# Altium PCB Main_Board.PcbDoc (part 13 of 14)
Units mm, origin at the board's own origin, x right, y up, seen from the top; angles counter-clockwise.
Board outline 142 x 82 mm, 10 copper layers (L1_Top, L2_PWR1, L3_Sig1, L4_GND1, L5_Sig2, L6_Sig3, L7_GND2, L8_Sig4, L9_GND3, L8_Bottom), stack 1.71 mm thick; 299 components, 328 nets, 2329 pads, 2908 vias.
Unrouted connection lines stored in the file: 2.
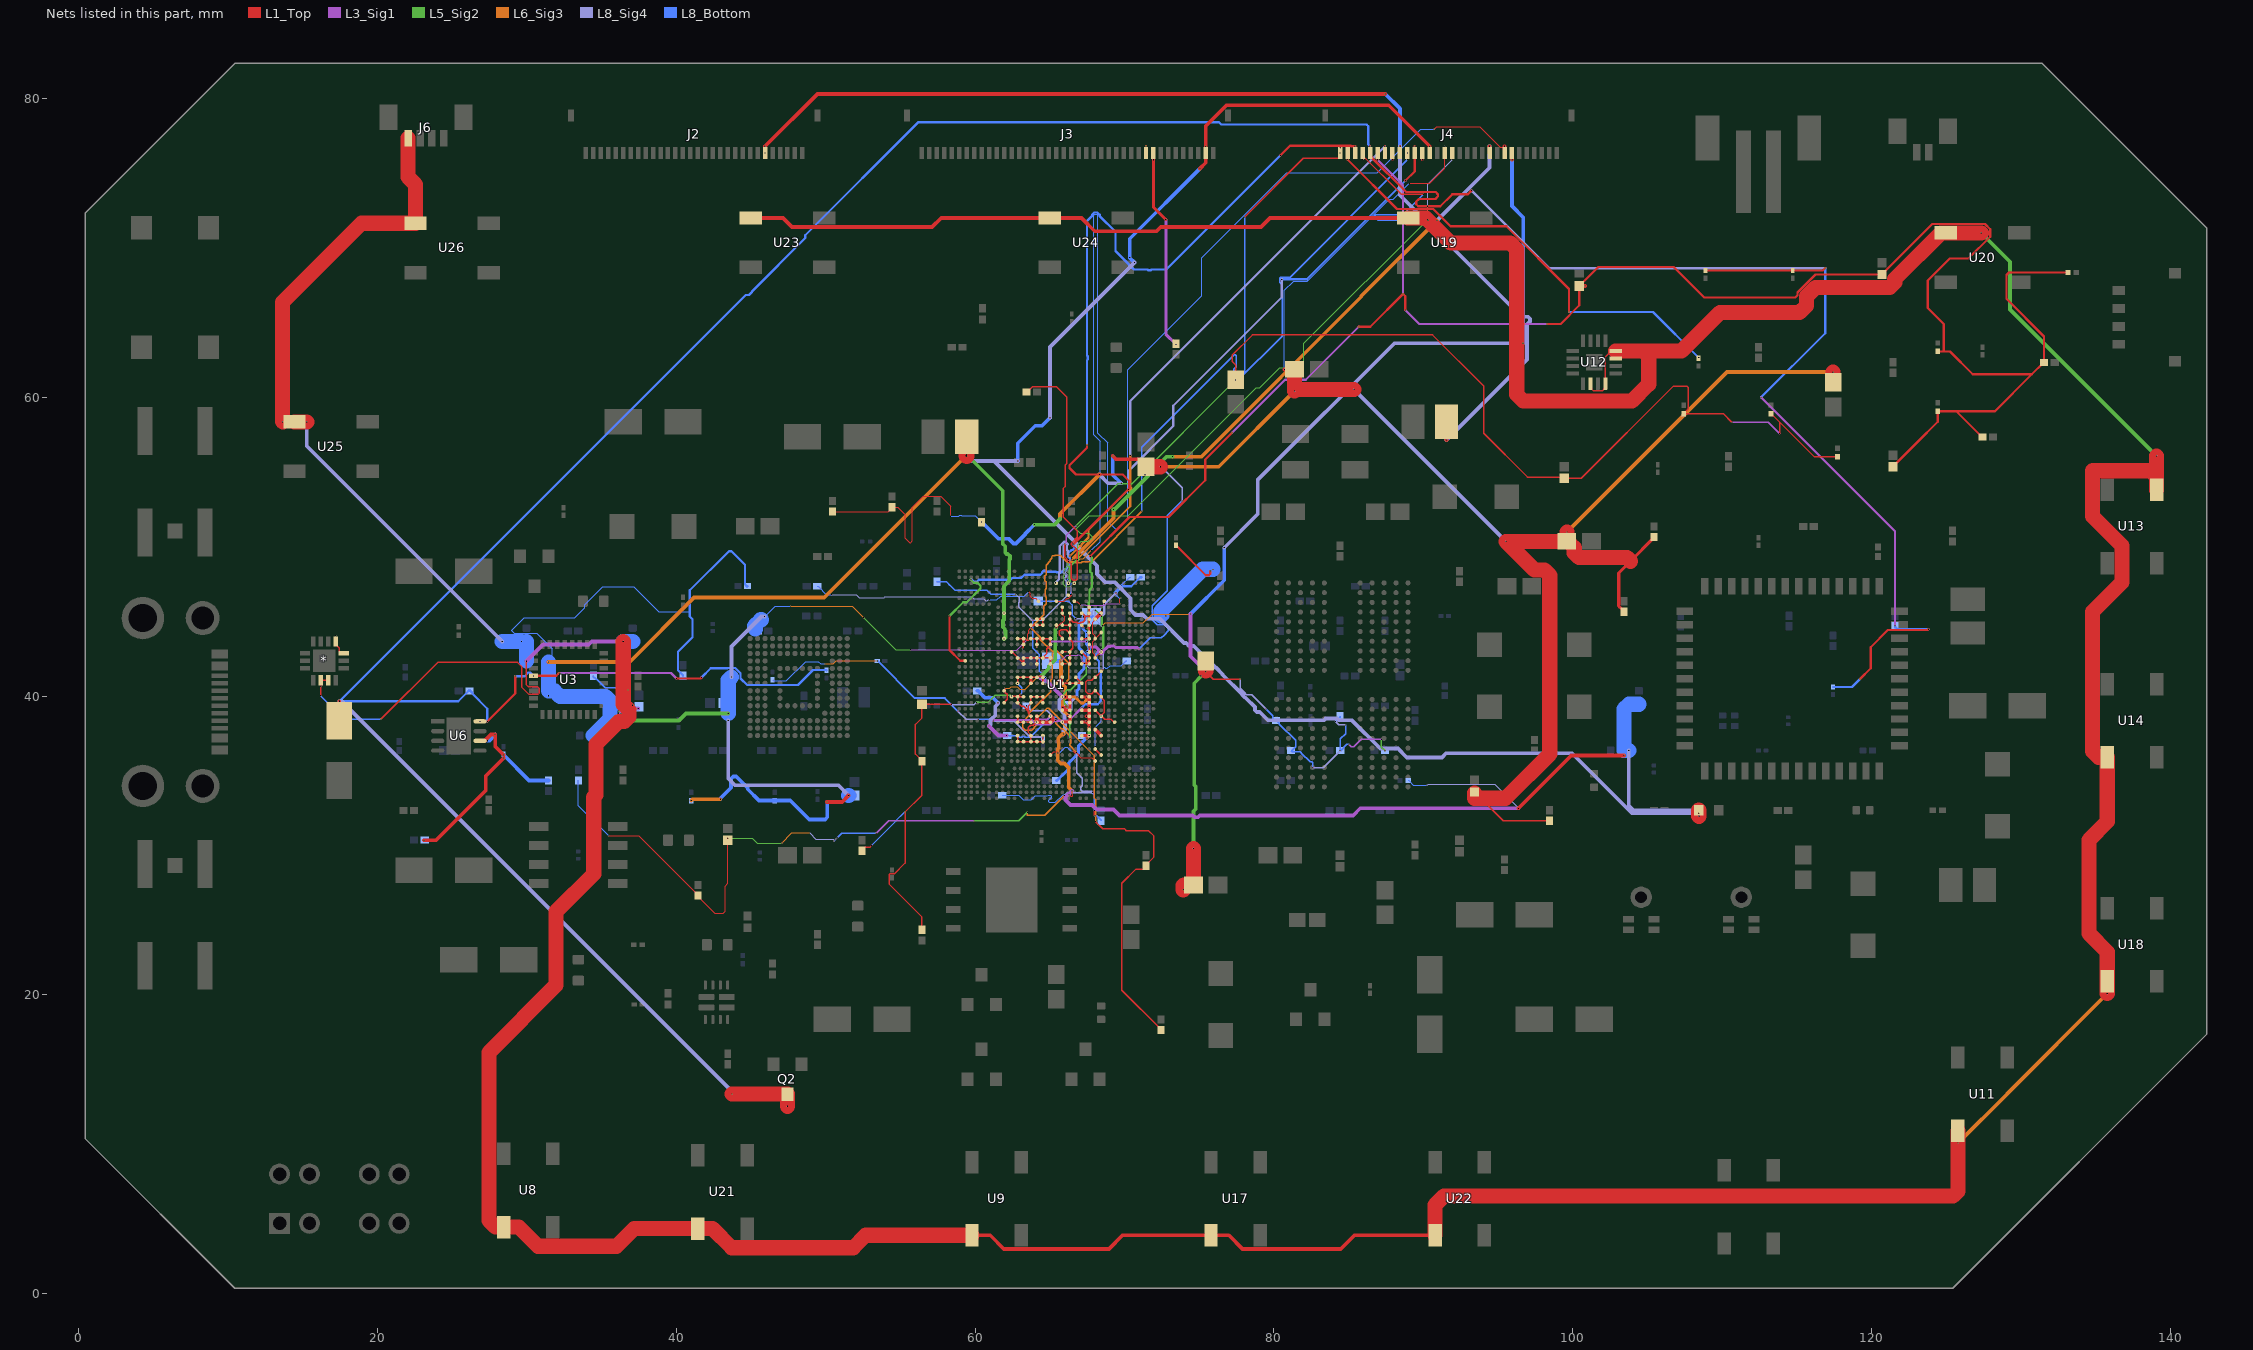
[diagram p20: the nets of this part, all layers, seen from the top]

## Via types
v1: diameter 0.1, hole 0.08, L1_Top to L8_Bottom, 1169 vias
v2: diameter 0.01, hole 0.01, L3_Sig1 to L8_Sig4, 433 vias
v3: diameter 0.01, hole 0.01, L8_Sig4 to L8_Bottom, 375 vias
v4: diameter 0.01, hole 0.01, L1_Top to L3_Sig1, 355 vias
v5: diameter 0.254, hole 0.01, L1_Top to L8_Bottom, 150 vias
v6: diameter 0.01, hole 0.01, L6_Sig3 to L8_Bottom, 129 vias
v7: diameter 0.05, hole 0.04, L1_Top to L8_Bottom, 104 vias
v8: diameter 0.01, hole 0.01, L1_Top to L5_Sig2, 89 vias
v9: diameter 0.01, hole 0.01, L1_Top to L8_Bottom, 41 vias
v10: diameter 0.1, hole 0.08, L1_Top to L3_Sig1, 17 vias
v11: diameter 0.1, hole 0.08, L1_Top to L5_Sig2, 11 vias
v12: diameter 0.1, hole 0.08, L8_Sig4 to L8_Bottom, 10 vias
v13: diameter 0.1, hole 0.08, L6_Sig3 to L8_Bottom, 9 vias
v14: diameter 1.27, hole 0.711, L1_Top to L8_Bottom, 8 vias
v15: diameter 0.4, hole 0.2, L1_Top to L8_Bottom, 4 vias
v16: diameter 0.05, hole 0.08, L1_Top to L8_Bottom, 3 vias
v17: diameter 0.05, hole 0.08, L6_Sig3 to L8_Bottom, 1 vias

## Nets (pads, with @x,y where several pads share a name; then routed paths per layer and width w, separated by ;. In a path a pad name is that pad's centre, name@x,y a point inside that pad or via, vN(x,y) a via of type N, cw(c..) or ccw(c..) an arc to the next point about the centre after c; other vN are vias at no path point) (continued)
VCC5V: *.12 *.13 C128.1 C129.1 J4.4 J6.1 U8.1 U9.1 U11.1 U12.2 U12.4 U12.7 U12.8 U13.1 U14.1 U17.1 U18.1 U19.1 U20.1 U21.1 U22.1 U23.1 U24.1 U25.1 U26.1 | length 431.8
  L1_Top w0.102: v4(16.181,40.018) 16.181,40.639 v1(16.191,40.649) *.12@16.191,41.049 *.13@16.691,41.049 ; v3(20.218,38.445) 24.024,42.251 29.37,42.251 29.643,41.978 29.643,40.597 30.112,40.128 30.771,40.128 30.812,40.17 30.812,40.529 30.712,40.628 30.086,40.628 29.937,40.778 29.937,42.304 v1(29.967,42.334) ; v1(85.941,75.899) J4.4@85.941,76.349 85.941,76.185 88.537,73.59 v4(90.013,73.59) ; U12.2@101.191,60.914 101.191,60.629 101.397,60.423 101.986,60.423 102.191,60.629 U12.4@102.191,60.914 102.191,62.699 102.591,63.099 U12.8@102.876,63.099
  L1_Top w0.254: v1(13.641,58.349) 13.661,58.349 U25.1@14.441,58.349 ; U23.1@44.991,71.999 47.14,71.999 47.748,71.391 57.122,71.391 57.73,71.999 U24.1@64.991,71.999 67.128,71.999 68.016,71.111 72.144,71.111 72.425,71.391 79.142,71.391 79.75,71.999 U19.1@88.991,71.999 ; U9.1@59.791,3.899 61.011,3.899 61.921,2.989 68.961,2.989 69.871,3.899 U17.1@75.791,3.899 76.988,3.899 77.898,2.989 84.481,2.989 85.391,3.899 U22.1@90.791,3.899
  L1_Top w1.016: v1@13.661,58.349 13.636,58.375 13.636,66.362 18.923,71.649 U26.1@22.541,71.649 22.541,74.236 22.041,74.736 J6.1@22.041,77.349 ; U25.1@14.441,58.349 v1(15.261,58.349) ; v1(36.445,43.655) 36.445,39.446 36.822,39.069 36.822,38.609 36.51,38.297 36.142,38.297 34.616,36.771 34.616,33.369 34.474,33.227 34.474,28.095 31.949,25.57 31.949,20.642 27.453,16.146 27.453,4.881 27.885,4.449 U8.1@28.441,4.449 29.448,4.449 30.73,3.167 35.999,3.167 37.181,4.349 U21.1@41.441,4.349 42.425,4.349 43.709,3.065 51.842,3.065 52.675,3.899 U9.1@59.791,3.899 ; U19.1@88.991,71.999 90.166,71.999 91.84,70.325 95.83,70.325 96.262,69.893 96.262,60.19 96.694,59.758 103.983,59.758 105.101,60.876 105.101,62.73 104.732,63.099 ; U22.1@90.791,3.899 90.791,5.926 91.385,6.52 125.461,6.52 125.791,6.85 v1@125.791,10.086 ; U12.8@102.876,63.099 104.732,63.099 ; U11.1@125.791,10.899 v1@125.791,10.086 ; v1(125.802,10.076) v1@125.791,10.086 ; v1(127.351,70.999) U20.1@124.991,70.999 124.659,70.999 121.56,67.9 121.56,67.683 121.23,67.353 116.252,67.353 115.657,66.758 115.657,66.123 115.197,65.664 109.863,65.664 107.299,63.099 105.101,63.099 104.732,63.099 ; v1(135.791,20.083) U18.1@135.791,20.899 135.791,22.87 134.565,24.097 134.565,30.37 135.791,31.597 U14.1@135.791,35.899 135.2,35.899 134.794,36.306 134.794,45.641 136.769,47.617 136.769,50.061 134.794,52.037 134.794,55.059 134.819,55.085 138.692,55.085 139.091,54.686 ; U13.1@139.091,53.799 139.091,54.686 ; v1(139.091,56.07) 139.091,54.686
  L3_Sig1 w0.254: v1(29.967,42.334) 31.084,43.451 34.133,43.451 34.337,43.655 v1(36.445,43.655)
  L5_Sig2 w0.254: v1(127.351,70.999) 129.282,69.069 129.282,65.88 v1(139.091,56.07)
  L6_Sig3 w0.254: v1(125.802,10.076) 129.104,13.378 129.104,13.396 v1(135.791,20.083)
  L8_Sig4 w0.254: v1(15.261,58.349) 15.261,56.732 v12(28.342,43.651)
  L8_Bottom w0.102: v4(16.181,40.018) 17.754,38.445 v3(20.218,38.445) ; v4(90.013,73.59) 88.638,72.215 86.819,72.215 86.759,72.155 86.759,72.071 86.979,71.852 v3(90.332,71.852)
  L8_Bottom w0.254: v1(29.642,43.651) C129.1@29.967,43.651
  L8_Bottom w1.016: v12(28.342,43.651) v1(29.642,43.651) ; v1(29.967,42.334) C129.1@29.967,43.651 ; C128.1@37.079,43.651 v1@36.448,43.651 ; v1@36.448,43.651 36.445,43.651 v1(36.445,43.655) v1@36.448,43.651
  other v2: 20.218,38.445 16.181,40.018 90.332,71.852 90.013,73.59
  other v3: 16.181,40.018 90.013,73.59
  other v4: 20.218,38.445 90.332,71.852
VCC5V_EN: J4.3 U1.R32 | length 68.2
  L1_Top w0.152: v8(58.291,45.36) 58.291,43.08 59.004,42.368 59.323,42.368 U1.R32@59.341,42.349 ; v2(66.594,50.178) 70.323,53.907 70.323,54.379 69.877,54.825 66.762,54.825 66.316,55.271 66.316,55.455 67.485,56.625 v4(67.485,56.786) ; v4(80.443,76.197) 81.091,76.845 85.131,76.845 85.177,76.799 v1(85.441,76.799) J4.3@85.441,76.349
  L5_Sig2 w0.152: v8(58.291,45.36) 59.214,46.283 59.442,46.283 60.365,47.205 60.365,47.39 60.167,47.587 59.911,47.587 v9(59.714,47.784)
  L8_Bottom w0.152: v9(59.714,47.784) 59.797,47.784 59.94,47.64 60.095,47.64 60.238,47.784 62.363,47.784 62.482,47.903 63.078,47.903 63.302,48.126 64.382,48.126 64.493,48.236 64.493,48.296 64.578,48.382 64.699,48.382 64.759,48.322 65.095,48.322 65.096,48.323 65.217,48.323 65.218,48.322 65.423,48.322 65.457,48.288 65.806,48.288 65.84,48.322 65.871,48.322 66.052,48.503 66.087,48.503 66.173,48.589 66.173,48.624 66.343,48.794 66.343,49.217 66.241,49.318 66.241,49.566 66.447,49.773 66.52,49.773 66.641,49.894 66.641,50.131 v2(66.594,50.178) ; v4(67.485,56.786) 67.485,62.467 67.539,62.521 67.539,62.747 67.485,62.801 67.485,71.802 67.821,72.138 67.821,72.223 67.972,72.374 68.186,72.374 68.337,72.223 68.337,72.138 69.396,71.079 69.396,69.788 70.631,68.553 71.545,68.553 71.596,68.501 71.76,68.501 71.812,68.553 72.799,68.553 v4(80.443,76.197)
  other v2: 67.485,56.786 80.443,76.197
  other v3: 59.714,47.784 66.594,50.178 67.485,56.786 80.443,76.197
  other v4: 66.594,50.178
VCC_MCU: C122.1 D1.2 J4.5 Q2.3 R14.2 R27.2 R28.2 R59.1 R68.2 U3.4 U6.8 | length 255
  L1_Top w0.152: v1(27.349,38.299) 29.216,40.166 v4(29.216,41.327) ; v3(30.441,41.349) 31.955,41.349 v4(32.153,41.547) ; v4(40.01,41.178) 41.618,41.178 v4(41.679,41.239) ; v1(86.441,76.799) 86.441,76.155 88.86,73.737 90.839,73.737 90.995,73.581 90.995,73.455 90.817,73.277 89.715,73.277 89.537,73.099 89.537,72.915 89.668,72.784 91.142,72.784 91.939,73.581 92.974,73.581 v4(93.236,73.843) ; R28.2@108.897,68.481 R27.2@114.739,68.481 116.738,68.481 v4(116.908,68.651) ; v3(119.24,41.14) 119.951,41.851 119.951,43.264 121.102,44.415 123.759,44.415 v4(123.813,44.47)
  L1_Top w0.254: D1.2@17.441,38.349 v1(17.441,39.641) v1(17.441,39.649)
  L1_Top w1.016: v1(43.734,13.349) Q2.3@47.441,13.349 v1(47.441,12.532)
  L3_Sig1 w0.152: v4(32.153,41.547) 39.641,41.547 v4(40.01,41.178) ; v3(112.618,59.994) 121.589,51.023 v2(121.589,44.716)
  L8_Sig4 w0.152: v4(93.236,73.843) 98.45,68.629 116.886,68.629 v4(116.908,68.651)
  L8_Sig4 w0.254: v1(17.441,39.641) 17.618,39.641 43.734,13.526 v1(43.734,13.349)
  L8_Bottom w0.152: v1(17.441,39.641) v1@17.449,39.649 ; v1(17.441,39.649) v1@17.449,39.649 ; R59.1@26.15,40.349 26.104,40.349 25.404,39.649 v1@17.449,39.649 ; R59.1@26.196,40.349 26.351,40.194 26.351,40.148 27.349,39.15 v1(27.349,38.299) v3(26.858,38.299) ; v4(29.216,41.327) 29.85,41.327 30.092,41.569 30.218,41.569 30.438,41.349 v3(30.441,41.349) ; v4(41.679,41.239) 42.3,41.86 43.426,41.86 43.442,41.876 43.942,41.876 44.296,41.522 44.296,41.179 44.742,40.733 48.141,40.733 49.153,41.745 50.024,41.745 R68.2@50.049,41.72 ; v1(86.441,76.799) 86.318,76.923 86.318,78.142 86.195,78.265 76.472,78.265 76.318,78.419 56.219,78.419 48.638,70.838 48.638,70.659 45.06,67.08 45.06,67.045 44.858,66.843 44.643,66.843 v1@17.449,39.649 ; v3(112.618,59.994) 116.908,64.284 v4(116.908,68.651) ; R14.2@117.441,40.604 118.704,40.604 v3(119.24,41.14) ; C122.1@121.589,44.662 121.589,44.625 121.744,44.47 v4(123.813,44.47)
  other v2: 26.858,38.299 119.24,41.14 41.679,41.239 29.216,41.327 30.441,41.349 123.813,44.47 112.618,59.994 116.908,68.651 93.236,73.843
  other v3: 41.679,41.239 29.216,41.327 123.813,44.47 121.589,44.716 116.908,68.651
  other v4: 26.858,38.299 119.24,41.14 30.441,41.349
VDD_DDR: C97.1 C98.1 C99.1 C100.1 C101.1 C102.1 C103.1 C104.1 J4.24 U1.AA10 U1.AC11 U1.AD10 U1.AE8 U1.AF11 U1.AG10 U1.AJ11 U1.AK10 U1.H10 U1.J11 U1.L10 U1.M11 U1.P10 U1.R11 U1.U10 U1.V11 U1.Y11 | length 115.5
  L1_Top w0.04: U1.J11@68.041,45.149 68.041,45.105 67.876,44.94 67.876,44.181 68.001,44.056 68.001,43.889 U1.M11@68.041,43.849 ; v2(68.441,42.949) 68.254,42.762 68.202,42.762 68.041,42.601 U1.R11@68.041,42.549 68.001,42.589 68.001,42.756 67.876,42.881 67.876,43.64 67.965,43.729 67.965,43.773 U1.M11@68.041,43.849 ; U1.L10@68.441,44.249 U1.M11@68.041,43.849
  L1_Top w0.1: U1.AJ11@68.041,36.449 U1.AK10@68.441,36.049 ; v11(75.441,41.63) 75.936,41.136 v4(77.741,41.136)
  L1_Top w0.102: U1.AC11@68.041,39.049 v3(68.441,38.649) ; v1(68.041,40.524) U1.Y11@68.041,40.349 ; v4(68.588,41.752) 68.584,41.752 68.482,41.649 U1.U10@68.441,41.649 U1.V11@68.041,41.249 68.001,41.249 67.805,41.053 67.527,41.053 67.394,40.921 67.394,40.32 67.56,40.153 67.805,40.153 68.001,40.349 U1.Y11@68.041,40.349 ; U1.AE8@69.341,38.249 69.301,38.249 69.101,38.449 68.682,38.449 68.482,38.649 v3(68.441,38.649) ; U1.Y11@68.041,40.349 U1.AA10@68.441,39.949 68.441,39.909 68.637,39.713 68.637,38.885 68.441,38.689 v3(68.441,38.649)
  L1_Top w0.254: U1.AF11@68.041,37.749 U1.AG10@68.441,37.349 ; U1.J11@68.041,45.149 v8(68.347,45.455) U1.H10@68.441,45.549 ; v1(95.941,75.899) J4.24@95.941,76.349
  L1_Top w1.016: v1(73.938,27.032) 73.938,27.322 73.965,27.349 C97.1@74.616,27.349 v11(74.616,29.796) ; v11@75.441,41.672 C98.1@75.441,42.349
  L3_Sig1 w0.1: v3(85.026,36.755) 85.172,36.609 85.353,36.609 85.849,37.105 87.192,37.105 v8(87.197,37.099)
  L3_Sig1 w0.254: v3(74.415,45.485) 74.415,42.657 v11(75.441,41.63)
  L5_Sig2 w0.1: v8(87.197,37.099) 87.197,36.584 v9(87.447,36.335)
  L5_Sig2 w0.102: v2(68.041,45.74) 68.061,45.74 v8(68.347,45.455)
  L5_Sig2 w0.254: v11(74.616,29.796) 74.616,32.29 74.768,32.442 74.768,33.95 74.669,34.049 74.669,40.858 v1@75.145,41.333
  L6_Sig3 w0.04: v6(68.517,44.705) 68.707,44.895 71.266,44.895 71.856,45.485 v3(74.415,45.485)
  L8_Sig4 w0.04: 68.041,45.127 68.453,44.716 68.507,44.716 v6(68.517,44.705)
  L8_Sig4 w0.1: v4(77.741,41.136) 77.741,40.532 78.09,40.183 78.09,40.155 78.16,40.085 78.528,40.085 v3(79.486,39.127) ; v3(82.603,35.195) 83.307,35.195 84.441,36.33 v3(84.441,36.349) ; v3(84.124,38.295) 84.345,38.073 v3(84.797,38.073)
  L8_Sig4 w0.102: v3(66.741,45.196) 66.751,45.186 67.516,45.186 67.839,45.509 67.839,45.681 67.899,45.74 v2(68.041,45.74) 68.041,45.127 ; v2(68.441,42.949) 68.588,42.803 v4(68.588,41.752)
  L8_Sig4 w0.254: v3(76.681,49.929) 78.916,52.164 78.916,54.458 88.071,63.613 v3(96.677,63.613)
  L8_Bottom w0.04: v1(68.041,36.624) v1(68.041,37.924) 68.441,38.324 v3(68.441,38.649)
  L8_Bottom w0.1: v3(79.486,39.127) 79.923,38.69 79.923,38.531 80.104,38.349 80.196,38.349 80.377,38.168 80.377,38.122 81.455,37.044 81.455,36.608 81.196,36.349 C104.1@81.15,36.349 81.232,36.267 81.78,36.267 81.851,36.196 81.851,36.177 82.432,35.595 82.539,35.595 82.609,35.525 82.609,35.201 v3(82.603,35.195) ; v3(84.124,38.295) 84.141,38.295 84.441,38.595 C103.1@84.441,38.641 ; v3(84.797,38.073) 84.797,37.48 84.441,37.124 v3(84.441,36.349) 84.487,36.349 84.893,36.755 v3(85.026,36.755)
  L8_Bottom w0.102: C99.1@64.219,46.349 66.245,46.349 66.493,46.101 66.493,45.444 v3(66.741,45.196)
  L8_Bottom w0.254: v3(74.415,45.485) 76.681,47.751 v3(76.681,49.929) ; v1(95.941,75.899) 95.941,72.801 96.701,72.041 96.701,63.637 v3(96.677,63.613)
  other v1: 75.124,41.354
  other v2: 85.026,36.755 68.441,38.649 77.741,41.136 68.588,41.752 74.415,45.485
  other v3: 68.588,41.752
  other v4: 68.441,38.649 68.441,42.949
VDD_EE: C16.1 C17.1 C18.1 C19.1 C20.1 C21.1 C22.1 J4.10 U1.AD18 U1.AD20 U1.AE18 U1.AE19 U1.AE20 U1.AG19 U1.AG21 U1.AG23 U1.AH19 U1.AH20 U1.AH21 U1.AH22 U1.AH23 U1.J19 U1.J20 U1.K19 U1.K20 U1.K21 U1.V14 U1.V16 U1.W13 U1.W14 U1.W15 U1.W16 U1.W17 | length 143.6
  L1_Top w0.04: v4(63.536,43.812) 63.536,44.169 63.576,44.209 63.576,44.409 v1(63.741,44.574) 63.916,44.749
  L1_Top w0.1: U1.W17@65.441,40.849 U1.V16@65.841,41.249 U1.W16@65.841,40.849 66.064,40.849 ; v1(66.064,40.952) 66.064,40.849 ; U1.V14@66.741,41.249 U1.W13@67.141,40.849 U1.W14@66.741,40.849 U1.W15@66.341,40.849 66.064,40.849
  L1_Top w0.102: U1.AG23@62.841,37.349 U1.AH23@62.841,36.949 U1.AH22@63.241,36.949 U1.AH21@63.741,36.949 ; v1(63.741,44.574) U1.K21@63.741,44.749 63.916,44.749 U1.K20@64.141,44.749 U1.K19@64.541,44.749 U1.J19@64.541,45.149 U1.J20@64.141,45.149 ; U1.AH20@64.141,36.949 U1.AH21@63.741,36.949 ; U1.AE20@64.141,38.249 64.101,38.249 63.899,38.046 63.72,38.046 63.546,37.872 63.546,37.585 63.741,37.389 U1.AG21@63.741,37.349 U1.AH21@63.741,36.949 ; U1.AH20@64.141,36.949 U1.AH19@64.574,36.949 ; U1.AH19@64.541,36.949 U1.AG19@64.541,37.349
  L1_Top w0.254: v4(50.083,32.912) 51.102,32.912 v1(51.532,33.342) ; U1.AD20@64.141,38.649 U1.AE20@64.141,38.249 U1.AE19@64.541,38.249 U1.AE18@65.041,38.249 65.193,38.401 65.193,38.532 65.076,38.649 v4(65.041,38.649)
  L3_Sig1 w0.04: v8(55.669,43.108) 58.937,43.108 58.986,43.059 62.783,43.059 v4(63.536,43.812)
  L3_Sig1 w0.1: v2(64.121,38.249) 64.321,38.449 64.841,38.449 v4(65.041,38.649)
  L3_Sig1 w0.254: v8(36.289,38.83) 36.62,39.161 v2(37.452,39.161)
  L5_Sig2 w0.04: v2(52.543,45.246) 54.681,43.108 v8(55.669,43.108)
  L5_Sig2 w0.1: v9(36.142,38.995) 36.142,38.977 v8(36.289,38.83)
  L5_Sig2 w0.254: v8(36.289,38.83) 36.768,38.351 40.168,38.351 40.652,38.835 v1(43.482,38.835)
  L6_Sig3 w0.04: v6(47.641,46.024) 51.765,46.024 v2(52.543,45.246)
  L6_Sig3 w0.1: v2(64.121,38.249) 64.121,38.074 63.956,37.909 63.956,37.869 63.791,37.704 63.352,37.704 63.182,37.875 63.182,38.245 63.637,38.7 63.637,38.889 64.454,39.706 64.504,39.706 65.069,40.27 65.069,41.072 65.161,41.165 65.161,42.824 65.326,42.989 ; v1(66.064,40.952) 66.115,40.952 66.286,41.123 66.286,42.199 65.496,42.989 65.326,42.989 ; v6(71.16,52.367) 67.797,49.003 67.172,49.003 67.093,48.924 66.204,48.924 65.712,49.416 65.611,49.416 65.599,49.428 65.383,49.428 65.333,49.379 65.177,49.379 65.133,49.335 65.133,49.229 65.033,49.129 65.033,49.042 64.759,48.767 64.759,48.126 64.671,48.038 64.671,47.727 64.761,47.636 64.761,47.205 64.686,47.13 64.686,46.699 64.761,46.624 64.761,46.164 64.596,45.999 64.596,45.429 v1(63.741,44.574) 64.367,43.949 64.367,43.779 65.157,42.989 65.326,42.989
  L6_Sig3 w0.254: v6(40.996,33) 41.084,33.088 v6(42.944,33.088)
  L8_Sig4 w0.1: v3(36.762,40.414) 36.762,39.676 v3(37.056,39.382)
  L8_Sig4 w0.254: v1(43.481,38.36) 43.481,34.472 43.925,34.028 50.847,34.028 v1(51.532,33.342) ; v3(43.692,41.272) 43.692,43.315 45.697,45.32 v3(45.903,45.32)
  L8_Bottom w0.04: 45.692,45.109 v3(45.903,45.32) 46.607,46.024 v6(47.641,46.024)
  L8_Bottom w0.1: C19.1@34.441,41.349 34.441,41.304 34.623,41.122 34.668,41.122 35.236,40.555 36.202,40.555 36.343,40.414 v3(36.762,40.414) ; v9(36.142,38.995) 36.668,38.995 v3(37.056,39.382) ; v6(71.16,52.367) 71.16,56.66 77.35,62.85 77.429,62.85 77.485,62.795 77.485,62.029 77.321,61.865 77.321,61.099 77.391,61.028 77.491,61.028 80.555,64.092 80.555,67.513 80.38,67.688 80.38,67.954 80.465,68.04 81.082,68.04 v1(88.941,75.899) v3(88.941,76.349)
  L8_Bottom w0.254: v6(42.944,33.088) 42.944,33.14 43.664,33.86 43.664,34.461 43.809,34.607 44.015,34.607 44.777,33.845 44.777,33.762 45.538,33 C17.1@46.584,33 47.63,33 48.893,31.736 49.959,31.736 50.105,31.882 50.105,32.89 v4(50.083,32.912) ; v1(51.537,33.337) C22.1@51.918,33.337
  L8_Bottom w1.016: v1(43.482,38.835) 43.482,41.062 v3(43.692,41.272) ; C20.1@45.284,44.477 45.284,44.553 45.243,44.594 45.243,44.697 45.654,45.109 45.692,45.109 ; v1(51.532,33.342) v1(51.537,33.337)
  other v2: 50.083,32.912 88.941,76.349
  other v3: 50.083,32.912 37.452,39.161
  other v4: 88.941,76.349
VDD_GPU: C32.1 C33.1 C34.1 C35.1 C36.1 C37.1 C38.1 C39.1 J4.6 U1.M18 U1.M19 U1.M20 U1.M21 U1.M22 U1.M23 U1.N18 U1.N20 U1.N22 U1.P24 U1.R18 U1.R19 U1.R20 U1.R21 U1.R22 U1.R23 U1.T18 U1.T20 U1.T22 | length 148.7
  L1_Top w0.102: U1.P24@62.441,42.949 62.482,42.949 62.564,42.867 62.573,42.867 62.813,42.626 62.813,42.578 U1.R23@62.841,42.549 62.882,42.549 62.964,42.467 62.973,42.467 63.213,42.226 63.213,42.178 U1.T22@63.241,42.149 U1.R22@63.241,42.549 U1.R21@63.741,42.549 U1.R20@64.141,42.549 ; U1.M23@62.841,43.849 U1.M22@63.241,43.849 ; v1(63.146,43.179) 63.213,43.246 63.213,43.421 U1.N22@63.241,43.449 U1.M22@63.241,43.849 ; v1(64.141,41.974) U1.T20@64.141,42.149 U1.R20@64.141,42.549 ; v1(64.141,43.274) U1.N20@64.141,43.449 U1.M20@64.141,43.849 ; U1.T18@65.041,42.149 U1.R18@65.041,42.549 U1.R19@64.541,42.549 ; v1(65.041,43.274) U1.N18@65.041,43.409 ; U1.M22@63.241,43.849 63.27,43.821 63.4,43.821 63.499,43.722 63.574,43.722 63.701,43.849 U1.M20@64.141,43.849 ; U1.R20@64.141,42.549 U1.R19@64.541,42.549 ; U1.M20@64.141,43.849 U1.M19@64.541,43.849 U1.M18@65.041,43.849 U1.N18@65.041,43.449 U1.N18@65.041,43.409 ; U1.R19@64.541,42.549 64.541,42.589 64.791,42.839 64.791,43.159 U1.N18@65.041,43.409
  L1_Top w0.152: v8(67.716,49.351) 67.716,49.358 70.338,51.98 72.943,51.98 75.408,54.446 75.408,55.828 v4(77.198,57.618) ; v4(85.69,64.713) 86.449,64.713 v4(88.649,66.913) 88.803,66.759 v4(88.803,65.835) ; v1(86.941,75.899) J4.6@86.941,76.349 ; v4(98.285,64.911) 99.2,64.911 100.441,66.153 C36.1@100.441,67.447 ; C36.1@100.632,67.447 100.632,67.636 101.709,68.713 106.775,68.713 108.815,66.672 114.898,66.672 115.052,66.827 115.052,67.008 116.263,68.219 C34.1@120.708,68.219 ; C34.1@120.708,68.23 124.082,71.603 127.602,71.603 127.956,71.249 127.956,70.749 126.491,69.284 125.24,69.284 123.775,67.819 123.775,65.982 124.851,64.906 124.851,63.069 ; C35.1@121.441,55.349 121.441,55.36 123.054,56.973 123.056,56.973 124.441,58.358 C37.1@124.441,59.069 125.676,59.069 ; C32.1@124.441,63.069 124.851,63.069 ; C39.1@127.441,57.349 127.396,57.349 125.676,59.069 ; C38.1@131.518,62.318 130.742,61.542 ; C38.1@131.564,62.318 131.564,64.072 129.045,66.59 129.045,68.189 129.205,68.349 C33.1@133.161,68.349 ; 124.851,63.069 125.26,63.069 126.788,61.542 130.742,61.542 ; 125.676,59.069 128.269,59.069 130.742,61.542
  L1_Top w0.254: C36.1@100.632,67.447 v1(100.823,67.447)
  L3_Sig1 w0.152: v1(65.041,43.274) 65.041,43.565 65.131,43.654 v8(67.466,43.654) ; v4(77.198,57.618) 80.745,61.165 82.142,61.165 v4(85.69,64.713) ; v1(86.941,75.899) 88.649,74.192 v4(88.649,66.913) ; v4(88.803,65.835) 89.727,64.911 v4(98.285,64.911)
  L5_Sig2 w0.152: v8(67.466,43.654) 67.515,43.703 67.527,43.703 67.616,43.792 67.616,46.262 67.654,46.299 67.654,47.105 67.808,47.259 67.808,48.215 67.706,48.316 67.706,48.829 67.817,48.939 67.817,49.25 v8(67.716,49.351)
VDD_NPU: C41.1 C42.1 C43.1 C44.1 C45.1 C46.1 C48.1 C49.1 C50.1 C51.1 C52.1 C53.1 C54.1 J4.1 U1.AA19 U1.AA20 U1.AA21 U1.AA22 U1.AA23 U1.AA24 U1.AB19 U1.AB21 U1.AB23 U1.AD21 U1.AD23 U1.AE21 U1.AE22 U1.AE23 U1.V19 U1.V20 U1.V21 U1.V22 U1.V23 U1.W19 U1.W21 U1.W23 | length 199.9
  L1_Top w0.102: C48.1@52.441,29.641 52.441,29.686 52.622,29.867 52.945,29.867 v4(53.073,29.995) ; C50.1@56.441,24.349 56.441,25.21 54.239,27.412 54.239,28.047 54.281,28.088 54.589,28.088 55.316,28.815 v3(55.316,32.238) 56.441,33.363 C52.1@56.441,35.641 56.441,35.686 56.009,36.119 56.009,38.094 56.441,38.526 C43.1@56.441,39.447 58.398,39.447 v4(58.416,39.429) ; U1.AA24@62.441,39.949 62.47,39.978 62.896,39.978 v4(63.041,40.123) ; U1.AD23@62.841,38.649 U1.AE23@62.841,38.249 U1.AE22@63.241,38.249 v1(63.416,38.249) U1.AE21@63.741,38.249 U1.AD21@63.741,38.649 63.741,38.689 63.546,38.885 63.546,39.313 63.741,39.509 U1.AA21@63.741,39.949 U1.AA20@64.141,39.949 U1.AA19@64.541,39.949 U1.AB19@64.541,39.549 ; U1.W23@62.841,40.849 U1.V23@62.841,41.249 U1.V22@63.241,41.249 U1.V21@63.741,41.249 64.182,41.249 64.257,41.325 64.425,41.325 64.501,41.249 U1.V19@64.541,41.249 U1.W19@64.541,40.849 64.568,40.822 v1(64.69,40.822) ; U1.AA22@63.241,39.949 U1.AA23@62.841,39.949 U1.AB23@62.841,39.549 62.882,39.549 63.114,39.316 63.251,39.316 63.456,39.112 63.456,39.058 63.589,38.925 ; C53.1@63.441,60.349 63.487,60.349 63.856,60.718 65.431,60.718 66.139,60.01 66.139,55.572 66.049,55.481 66.049,54.044 65.891,53.886 65.891,52.001 66.837,51.055 66.837,50.629 66.447,50.239 66.447,50.117 66.533,50.031 66.58,50.031 66.837,49.774 66.837,47.91 66.845,47.902 66.845,47.839 66.801,47.795 66.764,47.795 66.722,47.753 66.56,47.753 66.437,47.876 66.437,48.818 66.128,49.127 66.128,49.188 66.011,49.306 v2(66.011,50.171) ; v9(68.068,31.59) 68.55,31.107 70.004,31.107 70.124,30.987 71.617,30.987 71.974,30.631 71.974,29.219 71.441,28.686 C51.1@71.441,28.641 71.441,28.595 71.261,28.414 70.766,28.414 69.817,27.466 69.817,20.31 72.441,17.686 C49.1@72.441,17.641 ; v3(77.441,61.149) 77.441,62.177 77.217,62.401 77.217,62.827 78.563,64.172 90.621,64.172 94.047,60.747 94.047,57.589 96.978,54.658 99.604,54.658 99.691,54.571 100.576,54.571 106.754,60.749 107.636,60.749 107.737,60.649 107.737,59.22 107.441,58.924 C44.1@107.441,58.904 110.078,58.904 v4(110.66,58.322) ; v4(78.045,72.072) 81.973,76 84.342,76 84.441,76.099 v3(84.441,76.349) ; C45.1@113.283,58.904 113.283,58.884 113.393,58.775 113.413,58.775 116.161,56.026 C46.1@117.735,56.026 ; v4(113.861,57.563) 113.861,58.307
  L1_Top w0.203: U1.W21@63.741,40.849 U1.V21@63.741,41.249
  L3_Sig1 w0.102: v2(66.011,50.171) 66.087,50.247 66.087,50.733 v8(66.753,51.399) ; v4(110.66,58.322) 113.102,58.322 v4(113.861,57.563)
  L5_Sig2 w0.102: v2(60.084,39.568) 60.872,39.568 61.353,40.049 62.372,40.049 v8(62.425,39.996) ; v8(66.753,51.399) 69.556,54.201 70.494,54.201 v3(77.441,61.149)
  L6_Sig3 w0.102: v1(63.416,38.249) 63.884,38.249 64.822,39.187 64.926,39.187 65.766,38.348 65.766,38.218 67.962,36.021 67.962,33.183 68.068,33.077 68.068,32.044 68.093,32.019 68.093,31.956 68.068,31.931 v9(68.068,31.59)
  L8_Sig4 w0.102: v4(58.416,39.429) 59.944,39.429 v2(60.084,39.568) ; v3(62.711,46.827) 62.908,46.63 62.927,46.63 62.971,46.585 62.971,46.289 62.921,46.239 62.921,45.959 63.802,45.078 v3(63.866,45.078) 64.516,45.078 65.811,46.373 65.829,46.373 65.873,46.417 65.873,46.435 66.087,46.649 66.087,47.579 66.1,47.592 66.1,47.692 66.013,47.779 66.013,47.923 66.079,47.989 66.079,48.076 65.906,48.249 65.906,50.066 v2(66.011,50.171)
  L8_Bottom w0.102: v4(53.073,29.995) 54.681,31.603 54.681,31.636 55.253,32.208 55.286,32.208 v3(55.316,32.238) ; C54.1@57.441,47.641 58.099,47.641 58.232,47.507 58.232,47.475 58.303,47.404 58.335,47.404 58.662,47.077 60.803,47.077 61.077,46.803 61.799,46.803 61.81,46.814 61.873,46.814 61.884,46.803 62.687,46.803 v3(62.711,46.827) ; v3(62.826,40.849) 63.117,40.558 63.117,40.199 v4(63.041,40.123) ; v3(63.866,45.078) 63.866,43.205 64.291,42.78 64.291,41.674 v1(64.716,41.249) 64.716,40.849 v1(64.69,40.822) ; v3(77.441,61.149) 78.045,61.753 v4(78.045,72.072) ; v3(84.441,76.349) v1(84.441,76.699)
  other v2: 53.073,29.995 55.316,32.238 58.416,39.429 63.041,40.123 62.826,40.849 77.441,61.149 78.045,72.072 84.441,76.349
  other v3: 53.073,29.995 63.041,40.123 78.045,72.072
  other v4: 55.316,32.238 62.826,40.849 66.011,50.171 77.441,61.149 84.441,76.349
VDDAO_1V8: C4.1 C5.1 C7.1 C8.1 C10.1 C11.1 C13.1 J3.39 J4.13 L3.2 L6.1 R19.2 U1.AB25 U1.AK18 U1.AL11 U1.G16 U1.H16 U1.H25 U1.K17 U1.M25 U1.Y25 | length 288
  L1_Top w0.04: U1.AK18@65.041,36.049 65.268,36.276 65.512,36.276 65.536,36.252 v4(65.536,36.185) ; U1.K17@65.441,44.749 65.439,44.747 65.439,44.549 v1(65.437,44.547) 65.611,44.721 65.611,44.752 65.775,44.916 65.842,44.916 66.006,45.081 66.006,45.292 65.841,45.457 U1.H16@65.841,45.667 ; v2(66.293,33.393) 66.303,33.393 66.314,33.382 66.403,33.293 66.414,33.281 66.471,33.281 66.495,33.304 66.477,33.536 cw(c66.641,33.549) 66.495,33.625 v4(66.495,33.66) ; v3(66.538,36.335) 66.659,36.214 66.81,36.214 66.948,36.075 66.948,36.009 67.087,35.87 67.82,35.87 U1.AL11@68.041,35.649
  L1_Top w0.1: U1.AB25@61.941,39.549 61.941,39.59 62.136,39.785 62.136,40.114 62.031,40.219 62.031,40.434 v1(61.941,40.524) ; U1.H16@65.841,45.549 65.841,45.667 U1.G16@65.841,45.949
  L1_Top w0.254: v1(59.441,56.146) L3.2@59.441,57.349 ; v4(75.048,75.307) 75.441,75.7 J3.39@75.441,76.349 v1(75.441,76.799) 75.441,78.157 76.832,79.548 87.693,79.548 v1(90.441,76.799) J4.13@90.441,76.349 ; v3(96.371,32.483) 99.912,36.024 v1(103.441,36.024)
  L1_Top w1.016: v1(59.392,56.086) v1@59.441,56.136 ; v1(59.441,56.05) v1@59.441,56.136 ; v1(59.441,56.146) v1@59.441,56.136 ; L6.1@108.441,32.349 v1(108.441,32.148) 108.441,31.958 v10(108.454,31.945)
  L3_Sig1 w0.254: v8(64.341,41.249) 64.571,41.019 64.771,41.019 v2(65.846,39.945) ; v2(66.293,33.393) 66.288,33.397 66.288,33.454 ; v4(66.495,33.66) 66.288,33.454 ; v3(96.371,32.483) 85.787,32.483 85.315,32.011 75.064,32.011 74.944,31.891 74.682,31.891 74.562,32.011 69.657,32.011 69.271,32.397 68.141,32.397 67.834,32.704 66.384,32.704 66.051,33.037 66.051,33.247 66.258,33.454 66.288,33.454
  L5_Sig2 w0.254: v1(59.441,56.146) 61.851,53.737 61.851,50.186 62.017,50.02 62.017,49.596 62.104,49.509 62.186,49.509 62.332,49.364 62.332,49.158 62.28,49.106 62.28,47.691 61.941,47.353 v8(61.941,45.549) 61.941,45.118 61.869,45.046 61.869,44.615 61.986,44.498 61.986,44.397 62.04,44.343 62.04,43.911 v8(61.941,43.812) ; v8(64.341,41.249) 64.934,41.842 64.934,41.989 65.364,42.418 65.364,44.474 v1(65.437,44.547)
  L6_Sig3 w0.04: v1(61.941,40.524) 62.314,40.524 62.404,40.614 62.818,40.614 62.992,40.44 63.344,40.44 64.154,41.249 v8(64.341,41.249)
  L6_Sig3 w0.254: v13(31.441,42.283) 36.877,42.283 41.188,46.594 49.9,46.594 v1(59.392,56.086) ; v6(65.928,37.457) 65.843,37.457 65.564,37.179 65.564,36.899 65.595,36.869 65.595,36.513 65.536,36.454 v4(65.536,36.185) 65.536,35.689 65.733,35.491 65.984,35.491 66.263,35.212 66.263,33.891 v4(66.495,33.66)
  L8_Sig4 w0.04: v3(90.252,34.034) 90.279,34.034 90.324,34.079 94.775,34.079 v3(96.382,32.472)
  L8_Sig4 w0.254: v1(59.441,56.05) 59.765,55.726 61.261,55.726 ; v3(62.854,55.726) 61.261,55.726 ; v3(65.02,58.628) 65.02,63.37 v3(70.664,69.014) ; v2(65.846,39.945) 65.644,39.743 65.644,39.143 65.993,38.794 65.993,38.186 66.017,38.162 66.017,37.766 65.928,37.676 v6(65.928,37.457) ; 81.482,38.371 79.623,38.371 79.058,38.936 78.854,38.936 78.739,39.052 78.739,39.255 78.106,39.888 78.079,39.888 77.893,40.074 77.893,40.101 76.565,41.429 76.565,41.458 76.117,41.906 76.088,41.906 74.641,43.353 74.331,43.353 74.133,43.552 73.987,43.552 72.36,45.179 71.497,45.179 71.243,45.433 70.747,45.433 70.405,45.775 70.405,46.549 69.331,47.623 68.694,47.623 68.158,48.159 68.158,48.719 67.361,49.516 67.33,49.516 66.812,50.034 66.812,50.175 61.261,55.726 ; 81.482,38.371 83.342,38.371 83.462,38.492 84.244,38.492 84.364,38.371 85.236,38.371 87.12,36.487 88.303,36.487 88.898,35.891 91.249,35.891 91.526,36.168 99.964,36.168 103.983,32.148 108.251,32.148 ; v1(103.755,36.349) 103.755,32.682 104.085,32.352 108.047,32.352 108.251,32.148 ; v1(108.441,32.148) 108.251,32.148
  L8_Bottom w0.04: v13(31.441,42.283) 31.684,42.526 31.684,43.154 30.64,44.199 29.16,44.199 28.98,44.379 28.98,44.413 29.811,45.244 33.193,45.244 33.865,45.915 33.865,46.101 35.065,47.301 37.148,47.301 38.822,45.628 40.905,45.628 ; R19.2@61.816,33.349 62.93,33.349 63.224,33.055 63.765,33.055 63.926,33.216 63.926,33.218 64.024,33.316 64.831,33.316 64.882,33.367 65.079,33.367 65.131,33.314 65.131,33.23 64.918,33.017 64.918,32.933 64.971,32.88 65.367,32.88 65.893,33.407 66.279,33.407 v2(66.293,33.393) ; v4(65.536,36.185) 65.644,36.185 66.036,36.576 66.167,36.576 66.407,36.335 v3(66.538,36.335) ; C4.1@89.001,34.349 89.021,34.349 89.337,34.034 v3(90.252,34.034) ; v3(96.371,32.483) v3(96.382,32.472)
  L8_Bottom w0.152: C10.1@40.441,41.349 40.441,41.395 40.114,41.722 40.114,42.956 41.088,43.93 41.088,45.145 40.905,45.328 40.905,45.628 40.905,47.073 43.526,49.694 43.69,49.694 44.593,48.791 44.593,47.475 44.718,47.349 C11.1@44.755,47.349
  L8_Bottom w0.254: v1(31.441,40.024) C7.1@31.441,40.349 ; v3(62.854,55.726) 62.854,56.919 64.022,58.087 64.479,58.087 v3(65.02,58.628) ; v3(70.664,69.014) 70.356,69.322 v3(70.356,69.344) 70.356,70.615 v4(75.048,75.307) ; v1(103.441,36.024) C5.1@103.441,36.349
  L8_Bottom w1.016: v13(31.441,42.283) C7.1@31.441,40.349 31.831,40.349 32.203,39.977 35.249,39.977 35.588,39.639 35.588,39.16 35.564,39.136 35.564,38.472 C8.1@34.441,37.349 ; v1(103.755,36.349) C5.1@103.441,36.349 103.441,39.123 103.767,39.449 C13.1@104.441,39.449
  other v2: 96.371,32.483 66.495,33.66 65.536,36.185 66.538,36.335 64.341,41.249 75.048,75.307
  other v3: 66.293,33.393 65.536,36.185 75.048,75.307
  other v4: 96.371,32.483 66.293,33.393 66.538,36.335
VDDAO_3V3: *.3 *.4 C1.1 C123.1 J3.31 J3.32 J4.2 R2.1 R15.1 R17.2 R20.2 R23.2 R29.2 R36.1 R37.2 R57.2 U1.F9 U6.6 | length 108.5
  L1_Top w0.1: v1(68.641,46.174) U1.F9@68.641,46.349
  L1_Top w0.102: *.4@17.191,43.649 17.191,43.449 17.442,43.198 17.442,42.948 17.541,42.849 *.3@17.741,42.849
  L1_Top w0.152: J3.31@71.441,76.349 v1(71.441,76.799) ; R36.1@73.441,50.095 73.441,50.049 73.497,49.994 73.542,49.994 75.444,48.092 75.646,48.092 75.735,48.181 75.735,48.345 v4(75.746,48.356) ; J4.2@84.941,76.349 v1(84.941,75.899) 88.237,72.603 90.673,72.603 91.823,71.453 95.556,71.453 99.759,67.25 v4(99.759,65.714)
  L1_Top w0.203: v1(71.936,75.905) 71.941,75.899 71.941,72.72 v4(72.765,71.896)
  L1_Top w0.254: v4(23.105,30.34) 23.913,30.34 27.244,33.67 27.244,34.651 v3(28.441,35.849) ; U6.6@26.858,36.999 27.163,36.999 27.586,37.422 v3(27.874,37.422) 27.874,36.617 v4(28.441,36.049)
  L3_Sig1 w0.152: v3(61.237,38.324) 61.308,38.395 63.768,38.395 64.061,38.103 65.04,38.103 65.287,38.35 66.266,38.35 v3(67.151,39.235)
  L3_Sig1 w0.203: v4(72.765,71.896) 72.765,64.221 v4(73.458,63.528)
  L5_Sig2 w0.152: v2(68.475,45.32) 68.475,44.747 68.588,44.635 68.588,43.21 v9(68.481,43.103)
  L6_Sig3 w0.04: v6(49.951,42.152) 50.508,42.152 50.705,42.349 v6(53.464,42.349)
  L8_Sig4 w0.127: v3(58.85,38.995) 59.4,38.445 v3(60.214,38.445) ; v3(61.237,38.324) 62.63,38.324 63.705,37.249 v3(64.541,37.249)
  L8_Sig4 w0.152: v2(68.475,45.32) 68.641,45.486 v1(68.641,46.174) 68.701,46.174 v3(69.441,46.914)
  L8_Bottom w0.04: R17.2@46.441,41.095 46.527,41.009 47.365,41.009 48.651,42.295 49.511,42.295 49.654,42.152 v6(49.951,42.152)
  L8_Bottom w0.127: R57.2@53.441,42.349 53.487,42.349 55.974,39.863 57.982,39.863 v3(58.85,38.995) ; v3(60.214,38.445) 61.116,38.445 v3(61.237,38.324)
  L8_Bottom w0.152: v3(67.151,39.235) 67.364,39.448 68.205,39.448 68.418,39.661 68.418,41.527 68.295,41.65 68.295,42.321 68.106,42.51 68.106,42.818 68.212,42.924 68.302,42.924 v9(68.481,43.103) ; v3(69.441,46.914) 69.881,47.354 70.455,47.354 71.05,47.949 R2.1@71.121,47.949 ; v4(99.759,65.714) 105.377,65.714 v3(108.441,62.649)
  L8_Bottom w0.254: v1(27.349,36.999) 27.451,36.999 v3(27.874,37.422) ; v3(28.441,35.849) v4(28.441,36.049) 30.141,34.349 R20.2@31.441,34.349
  L8_Bottom w0.5: C1.1@72.441,45.349 v1(72.766,45.349)
  L8_Bottom w1.016: C1.1@72.441,45.349 72.441,45.687 75.235,48.481 v7(75.922,48.481)
  other v1: 17.191,44.049
  other v2: 23.105,30.34 28.441,35.849 28.441,36.049 27.874,37.422 61.237,38.324 67.151,39.235 75.746,48.356 108.441,62.649 99.759,65.714
  other v3: 23.105,30.34 28.441,36.049 75.746,48.356 99.759,65.714
  other v4: 28.441,35.849 27.874,37.422 108.441,62.649
VDDAO_3V3_POR: C3.1 U1.F20 | length 15.9
  L1_Top w0.04: v3(63.582,46.978) 63.676,46.883 63.676,46.681 63.822,46.535 64.053,46.535 64.239,46.349 U1.F20@64.241,46.349
  L8_Sig4 w0.04: v3(50.402,46.794) 52.054,46.794 52.262,46.586 53.914,46.586 53.966,46.638 58.56,46.638 58.561,46.639 59.767,46.639 59.901,46.505 60.595,46.505 60.712,46.387 60.817,46.387 60.873,46.443 v3(60.977,46.443)
  L8_Bottom w0.04: C3.1@49.441,47.349 49.487,47.349 50.042,46.794 v3(50.402,46.794) ; v3(60.977,46.443) 61.458,46.443 61.708,46.693 63.297,46.693 v3(63.582,46.978)
  other v2: 63.582,46.978
  other v4: 63.582,46.978
VDDCPU_A: C24.1 C25.1 C26.1 C27.1 C28.1 C29.1 C30.1 C31.1 C55.1 C56.1 C57.1 C58.1 C59.1 C60.1 C61.1 C62.1 J4.15 U1.G12 U1.H12 U1.H13 U1.H15 U1.J12 U1.J15 U1.K12 U1.K13 U1.K15 U1.K16 U1.L12 U1.L15 U1.M12 U1.M13 U1.M15 U1.M16 U1.N12 U1.P12 U1.P13 U1.P15 U1.P16 U1.R12 U1.R15 U1.T12 U1.T13 U1.T15 U1.T16 | length 252.6
  L1_Top w0.04: v4(35.464,30.635) 37.493,30.635 41.441,26.686 C30.1@41.441,26.641 41.441,26.595 42.583,25.454 43.133,25.454 43.263,25.584 43.263,27.279 43.441,27.458 C57.1@43.441,30.349 ; C58.1@50.441,52.349 54.196,52.349 54.441,52.595 C60.1@54.441,52.641 54.812,52.641 55.332,52.121 55.332,50.558 55.618,50.272 55.688,50.272 55.804,50.388 55.804,52.641 56.538,53.375 57.689,53.375 58.365,52.699 v4(58.365,52.033) ; v4(89.067,74.316) 90.422,74.316 91.441,75.335 J4.15@91.441,76.349 v1(91.441,76.799)
  L1_Top w0.1: U1.T16@65.841,42.149 v1(66.166,42.149) U1.T15@66.341,42.149 U1.R15@66.341,42.549 U1.P15@66.341,42.949 ; U1.P16@65.841,42.949 v1(66.166,42.949) U1.P15@66.341,42.949 ; U1.M16@65.841,43.849 65.841,43.89 65.646,44.085 65.646,44.33 65.761,44.444 66.106,44.444 66.301,44.249 U1.L15@66.341,44.249 ; U1.K16@65.841,44.749 U1.K15@66.341,44.749 ; U1.H15@66.341,45.549 U1.J15@66.341,45.149 ; U1.T13@67.141,42.149 67.17,42.178 67.485,42.178 67.641,42.334 ; U1.P13@67.141,42.949 67.141,42.929 67.466,42.604 67.466,42.549 v1(67.553,42.549) U1.R12@67.641,42.549 67.641,42.334 ; U1.M13@67.141,43.849 67.466,43.849 ; U1.K13@67.141,44.749 67.141,44.709 67.23,44.62 v1(67.23,44.574) ; U1.H13@67.141,45.549 67.182,45.549 67.382,45.349 ; v1(67.466,43.92) 67.466,43.849 ; v1(67.47,44.574) 67.641,44.574 ; U1.T12@67.641,42.149 67.641,42.334 ; U1.P12@67.641,42.949 v1(67.641,43.274) U1.N12@67.641,43.449 ; U1.G12@67.641,45.949 U1.H12@67.641,45.549 67.641,45.349 ; v3(67.992,32.331) 67.992,32.013 v3(68.017,31.988) ; C26.1@93.441,33.571 93.441,33.56 95.361,31.641 C27.1@98.441,31.641 ; U1.P15@66.341,42.949 66.341,42.99 66.536,43.185 66.536,43.614 66.341,43.809 U1.M15@66.341,43.849 U1.L15@66.341,44.249 ; U1.L15@66.341,44.249 U1.K15@66.341,44.749 ; U1.K15@66.341,44.749 U1.J15@66.341,45.149 ; U1.J15@66.341,45.149 66.382,45.149 66.587,44.944 66.822,44.944 66.887,44.879 66.939,44.879 67.001,44.879 67.017,44.879 67.092,44.954 67.222,44.954 67.336,45.068 67.336,45.229 67.382,45.275 67.382,45.349 ; 67.382,45.349 67.641,45.349 ; 67.466,43.849 U1.M12@67.641,43.849 U1.L12@67.641,44.249 67.641,44.574 ; 67.641,44.574 U1.K12@67.641,44.749 U1.J12@67.641,45.149 67.641,45.349
  L1_Top w0.203: C28.1@103.441,45.641 103.441,45.686 103.177,45.951 103.16,45.951 103.088,46.022 103.088,48.242 103.873,49.027 105.441,50.595 C29.1@105.441,50.641
  L1_Top w0.254: v4(69.219,56.068) 69.438,55.85 71.015,55.85 71.441,55.424 C56.1@71.441,55.349 ; v1(80.709,61.862) C25.1@81.386,61.862 ; C55.1@117.441,61 v1(117.441,61.678)
  L1_Top w1.016: C56.1@71.441,55.349 v1(72.411,55.349) ; C25.1@81.386,61.862 v1(81.386,60.419) 81.488,60.52 v1(85.365,60.52) ; C26.1@93.441,33.507 93.441,33.157 95.504,33.157 98.474,36.127 98.474,48.069 98.113,48.43 97.455,48.43 v1(95.536,50.349) C24.1@99.616,50.349 ; v1(99.616,50.97) C24.1@99.616,50.349 ; 103.873,49.027 103.632,49.268 100.421,49.268 100.111,49.577 100.111,49.928 99.69,50.349 C24.1@99.616,50.349 ; v1(117.441,61.678) v1(117.441,61.689)
  L3_Sig1 w0.1: v2(53.383,30.811) 54.208,31.636 v8(59.917,31.636)
  L3_Sig1 w0.203: v1(67.641,43.274) 68.112,43.274 68.251,43.136 68.251,42.961 68.389,42.823 68.494,42.823 68.568,42.897 68.568,42.993 68.874,43.3 69.033,43.3 69.085,43.351 69.291,43.351 69.396,43.246 70.864,43.246 v2(70.969,43.141)
  L5_Sig2 w0.04: v8(43.441,30.476) 45.087,30.476 45.412,30.151 v2(47.058,30.151)
  L5_Sig2 w0.1: v8(59.917,31.636) 62.917,31.636 v2(63.503,32.222) ; v2(66.341,37.149) 66.341,38.071 66.406,38.136 66.406,39.058 65.955,39.509 65.955,39.838 65.926,39.867 65.926,40.157 66.173,40.404 66.391,40.404 67.443,41.456 v2(67.443,41.999)
  L5_Sig2 w0.254: v9(63.965,51.469) 65.318,51.469 v2(65.692,51.843)
  L6_Sig3 w0.04: v2(47.058,30.151) 47.74,30.833 v6(48.928,30.833)
  L6_Sig3 w0.1: v2(63.503,32.222) 63.503,32.054 63.47,32.021 64.669,32.021 v6(65.978,33.33) ; v6(65.4,38.35) 65.4,38.175 65.771,37.804 65.859,37.804 66.397,37.266 66.397,37.093 ; v2(66.341,37.149) 66.397,37.093 ; v6(66.784,36.206) 66.784,36.251 66.341,36.694 66.341,36.785 66.397,36.841 66.397,37.093 ; v2(67.443,41.999) 67.443,42.439 v1(67.553,42.549)
  L6_Sig3 w0.254: v2(65.692,51.843) 65.692,52.197 v6(68.319,54.825) ; v1(72.411,55.349) 76.317,55.349 v1(81.386,60.419) ; v1(99.616,50.97) 110.335,61.689 v1(117.441,61.689)
  L8_Sig4 w0.04: v6(48.928,30.833) 49.34,30.421 50.496,30.421 50.567,30.351 v3(50.567,30.281)
  L8_Sig4 w0.1: v3(63.441,39.349) 63.771,39.019 64.82,39.019 65.15,38.69 65.15,38.6 v6(65.4,38.35) ; v6(65.978,33.33) 66.183,33.535 v3(67.856,33.535) 67.767,33.624 67.172,33.624 67.083,33.713 67.083,33.905 67.161,33.983 67.161,34.505 66.805,34.861 66.805,36.185 v6(66.784,36.206) ; v1(72.411,55.349) 72.459,55.349 73.865,53.943 v3(73.865,53.064)
  L8_Sig4 w0.254: v6(68.319,54.825) 68.903,54.241 v3(69.784,54.241) ; v1(85.365,60.52) v1(95.536,50.349)
  L8_Bottom w0.04: C61.1@33.441,34.349 33.441,32.658 v4(35.464,30.635) ; v3(50.567,30.281) 50.567,30.292 v3(50.709,30.434) 50.709,30.447 v6(50.809,30.547) ; v4(58.365,52.033) 58.897,52.033 58.959,52.094 59.076,52.094 59.093,52.077 60.005,52.077 v3(60.441,51.641) ; v1(80.709,61.862) 80.709,67.159 81.327,67.777 82.253,67.777 87.73,73.255 88.006,73.255 v4(89.067,74.316)
  L8_Bottom w0.1: v6(50.809,30.547) 51.073,30.811 v2(53.383,30.811) ; v3(67.856,33.535) 67.992,33.399 v3(67.992,32.331) ; v3(68.017,31.988) 68.14,31.988 68.441,31.686 C59.1@68.441,31.641 ; v2(70.969,43.141) 71.722,43.894 72.473,43.894 72.655,44.076 ; 72.656,44.076 72.938,44.358 72.938,44.54 72.707,44.771 72.202,44.771 71.863,45.11 71.863,46.027 72.876,47.04 72.876,52.075 v3(73.865,53.064)
  L8_Bottom w0.203: v1(67.23,44.574) 67.23,44.486 v1(67.466,44.249) v1(67.466,43.92) 67.466,43.449 v1(67.641,43.274) 67.641,43.116 v1(67.505,42.98) ; v1@67.506,42.981 67.553,42.934 v1(67.553,42.549)
  L8_Bottom w0.254: v3(60.441,51.641) 61.548,50.534 62.244,50.534 62.574,50.204 62.738,50.204 63.351,50.818 63.351,50.855 v9(63.965,51.469) ; v4(69.219,56.068) 69.219,54.806 v3(69.784,54.241)
  other v1: 71.369,54.807
  other v2: 35.464,30.635 68.017,31.988 67.992,32.331 60.441,51.641 58.365,52.033 69.219,56.068 89.067,74.316
  other v3: 35.464,30.635 53.383,30.811 70.969,43.141 58.365,52.033 69.219,56.068 89.067,74.316
  other v4: 68.017,31.988 67.992,32.331 60.441,51.641
VDDCPU_A_PWM: J4.16 U1.C14 | length 43.4
  L1_Top w0.04: v1(91.941,75.899) J4.16@91.941,76.349
  L5_Sig2 w0.04: v8(66.641,47.549) 66.641,47.616 66.859,47.833 66.859,48.705 66.873,48.719 66.873,49.021 66.953,49.101 66.953,49.574 66.873,49.654 66.873,50.127 67.111,50.365 67.59,50.365 67.828,50.603 67.828,50.678 67.603,50.902 67.033,50.902 66.809,51.127 66.809,51.223 67.637,52.052 70.245,52.052 78.833,60.641 79.057,60.641 80.397,61.981 81.965,61.981 82.018,62.033 82.018,63.602 v2(90.3,71.884)
  L6_Sig3 w0.04: v6(90.288,72.787) 90.288,71.896 v2(90.3,71.884)
  L8_Sig4 w0.04: v6(90.288,72.787) 90.288,74.246 v1(91.941,75.899)
VDDCPU_B: C63.1 C64.1 C65.1 C66.1 C67.1 C68.1 C69.1 C70.1 U1.AA12 U1.AA13 U1.AA15 U1.AA16 U1.AB12 U1.AB15 U1.AC12 U1.AC13 U1.AC15 U1.AC16 U1.AD12 U1.AD15 U1.AE12 U1.AE13 U1.AE15 U1.AE16 U1.AF12 U1.AG12 U1.AG13 | length 40.8
  L1_Top w0.203: v3(65.841,38.249) U1.AE15@66.341,38.249 U1.AD15@66.341,38.649 66.329,38.649 66.274,38.704 v1(66.221,38.704) ; U1.AC16@65.841,39.049 U1.AC15@66.341,39.049 U1.AB15@66.341,39.549 66.341,39.799 ; U1.AA16@65.841,39.949 v1(66.046,39.949) ; v1(65.864,39.224) 66.02,39.224 v4(66.077,39.281) ; v1@66.046,39.94 66.2,39.94 66.341,39.799 ; U1.AA15@66.341,39.949 66.341,39.799 ; U1.AG13@67.141,37.349 v8(67.641,37.349) 67.641,37.337 67.496,37.191 v4(67.496,37.172) ; U1.AE13@67.141,38.249 67.15,38.258 67.376,38.258 v1(67.416,38.298) ; U1.AA13@67.141,39.949 67.15,39.94 v1(67.466,39.94) ; v1@67.416,38.249 67.466,38.249 67.632,38.083 67.632,37.758 U1.AF12@67.641,37.749 ; v1@67.466,39.949 U1.AA12@67.641,39.949
  L1_Top w0.254: U1.AC13@67.141,39.049 U1.AC12@67.641,39.049 ; v1(67.466,38.649) U1.AD12@67.641,38.649 ; U1.AE12@67.641,38.249 U1.AD12@67.641,38.649 ; U1.AA12@67.641,39.949 U1.AB12@67.641,39.549 v1(67.641,39.224) U1.AC12@67.641,39.049 ; U1.AD12@67.641,38.649 U1.AC12@67.641,39.049
  L3_Sig1 w0.04: v1(65.758,42.349) 66.145,42.736 66.866,42.736 66.881,42.751 66.989,42.751 67.025,42.716 67.025,42.689 67.176,42.539 67.176,42.33 v2(67.328,42.178)
  L3_Sig1 w0.254: v2(60.925,37.985) 61.561,37.349 v2(62.096,37.349)
  L5_Sig2 w0.203: v8(67.641,37.349) v1(67.641,37.924)
  L6_Sig3 w0.203: v1@65.841,39.224 65.841,39.624 66.046,39.829 66.046,39.889 v1(66.046,39.949) ; v1(65.864,39.224) 65.852,39.213 65.841,39.202 65.841,39.083 v1(66.221,38.704) ; 66.106,39.889 66.166,39.949 66.669,39.949 67.087,39.532 67.255,39.532 67.466,39.743 v1(67.466,39.94)
  L6_Sig3 w0.254: v1(65.758,42.349) 65.758,40.886 66.038,40.606 66.038,39.957 v1(66.046,39.949)
  L8_Sig4 w0.04: v2(67.328,42.178) 67.621,41.884 68.479,41.884 v3(68.497,41.902)
  L8_Sig4 w0.203: v4(66.077,39.281) 66.745,39.949 v3(66.816,39.949)
  L8_Sig4 w0.254: v2(60.925,37.985) 61.026,38.086 61.026,38.411 61.15,38.535 61.18,38.535 61.344,38.699 61.344,39.306 61.541,39.502 v3(61.541,39.55)
  L8_Bottom w0.04: v3(68.497,41.902) 68.507,41.913 68.672,41.913 68.722,41.862 68.858,41.862 69.035,42.039 69.794,42.039 70.104,42.349 C66.1@70.15,42.349
  L8_Bottom w0.1: C69.1@62.15,37.349 62.863,37.349 62.983,37.229 63.11,37.229 63.2,37.319 63.277,37.319 63.367,37.229 63.677,37.229 64.697,38.249 64.697,38.286 64.994,38.584 65.507,38.584 v3(65.841,38.249)
  L8_Bottom w0.203: C70.1@65.441,34.349 65.487,34.349 65.847,34.709 65.869,34.709 66.271,35.111 66.271,35.511 66.911,36.151 66.911,36.636 67.447,37.172 v4(67.496,37.172) ; v3(66.816,39.949) 66.816,40.357 66.965,40.505 66.965,41.491 67.279,41.806 67.279,42.001 67.329,42.051 67.329,42.842 66.97,43.201 66.97,44.865 67.249,45.144 v1(67.249,45.312)
  L8_Bottom w0.254: C67.1@60.15,40.349 60.196,40.349 60.659,39.886 61.205,39.886 v3(61.541,39.55) ; C64.1@65.092,42.349 v1(65.758,42.349) ; v1(67.249,45.312) 67.753,45.312 C63.1@67.79,45.349
  other v2: 67.496,37.172 65.841,38.249 66.077,39.281
  other v3: 67.496,37.172 62.096,37.349
  other v4: 65.841,38.249
VDDCPU_B_EN: R2.2 U1.F14 | length 5.7
  L1_Top w0.04: U1.F14@66.641,46.349 66.682,46.309 66.853,46.309 v4(67.041,46.121) ; v4(69.688,46.176) 69.688,46.495 v4(69.748,46.556)
  L3_Sig1 w0.04: v4(67.041,46.121) 67.368,46.121 67.409,46.079 68.674,46.079 68.77,46.176 v4(69.688,46.176)
  L8_Bottom w0.04: v4(69.748,46.556) 69.635,46.556 69.325,46.866 69.325,46.962 69.833,47.47 69.862,47.47 70.341,47.949 R2.2@70.387,47.949
  other v2: 69.748,46.556
  other v3: 69.748,46.556
VDDCPU_B_PWM: J4.21 U1.E15 | length 44.2
  L1_Top w0.04: U1.E15@66.241,46.749 66.282,46.789 66.39,46.789 v2(66.406,46.806)
  L1_Top w0.254: J4.21@94.441,76.349 v1(94.441,76.799)
  L5_Sig2 w0.254: v2(69.267,52.481) 69.322,52.481 71.566,54.725 71.566,54.783 72.806,56.023 v2(73.216,56.023)
  L6_Sig3 w0.04: v6(66.241,49.13) 66.502,49.13 66.625,49.253
  L6_Sig3 w0.254: 66.625,49.253 69.267,51.895 v2(69.267,52.481) ; v2(73.216,56.023) 75.148,56.023 85.853,66.727 85.853,66.779 v6(90.915,71.841)
  L8_Sig4 w0.04: v3(66.104,47.885) 66.169,47.951 66.169,48.114 66.07,48.213 66.07,48.323 66.156,48.409 66.156,49.044 v6(66.241,49.13)
  L8_Sig4 w0.254: v6(90.915,71.841) 94.441,75.367 v1(94.441,76.799)
  L8_Bottom w0.04: v3(66.104,47.885) 66.452,47.537 66.452,46.985 66.406,46.939 v2(66.406,46.806)
  other v3: 66.406,46.806
  other v4: 66.406,46.806
VDDDDR_PWM: J4.23 U1.F17 | length 96.4
  L1_Top w0.04: U1.F17@65.441,46.349 65.985,46.349 66.181,46.545 66.271,46.545 66.466,46.741 66.466,46.802 66.495,46.83 v4(66.495,46.846) ; v4(90.728,77.957) 90.892,78.121 93.776,78.121 95.168,76.729 95.311,76.729 95.441,76.599 J4.23@95.441,76.349
  L1_Top w0.254: J4.23@95.441,76.599 v1(95.441,76.799)
  L3_Sig1 w0.04: v8(66.441,47.354) 66.441,46.899 v4(66.495,46.846)
  L5_Sig2 w0.04: v2(66.241,49.014) 66.241,48.718 65.955,48.431 65.955,48.069 65.943,48.057 65.943,47.907 65.955,47.895 65.955,47.745 65.92,47.709 65.889,47.679 65.889,47.485 66.06,47.313 66.339,47.313 66.38,47.354 v8(66.441,47.354)
  L6_Sig3 w0.04: v2(66.241,49.014) 66.866,49.014 67.047,49.194 67.236,49.194 v6(67.792,49.751)
  L8_Bottom w0.04: v6(67.792,49.751) 68.364,50.323 68.364,57.052 67.937,57.479 67.937,72.175 68.02,72.258 68.138,72.258 68.221,72.175 68.221,57.597 68.874,56.943 68.874,51.689 69.443,51.119 69.476,51.119 70.234,51.877 70.234,61.841 75.185,66.792 75.185,69.34 80.878,75.033 86.912,75.033 89.835,77.957 v4(90.728,77.957)
  other v2: 90.728,77.957
  other v3: 90.728,77.957
VDDEE_MODE: J4.12 | length 0.5
  L1_Top w0.152: v1(89.941,75.899) J4.12@89.941,76.349
VDDEE_PWM: J4.11 U1.C17 | length 42.2
  L1_Top w0.152: v4(88.803,74.492) 89.441,75.13 J4.11@89.441,76.349 v1(89.441,76.799)
  L6_Sig3 w0.152: v6(66.343,49.36) 67.013,50.03 67.066,50.03 67.125,50.089 67.125,50.143 67.59,50.607 67.59,50.703 67.591,50.704 67.591,51.146 v6(70.279,53.834)
  L8_Sig4 w0.152: v4(65.391,47.584) 65.618,47.811 65.618,48.208 65.671,48.261 65.671,48.961 65.67,49.046 ; 65.671,49.047 65.671,50.038 65.95,50.318 66.072,50.318 66.207,50.183 66.207,50.158 66.147,50.098 66.147,49.861 66.158,49.85 66.158,49.779 66.207,49.73 66.207,49.495 v6(66.343,49.36) ; v6(70.279,53.834) 70.268,53.845 70.268,55.071 73.271,58.074 73.271,59.433 80.526,66.688 v3(80.526,67.894)
  L8_Bottom w0.152: v3(80.526,67.894) 82.205,67.894 v4(88.803,74.492)
  other v2: 65.391,47.584 88.803,74.492
  other v3: 88.803,74.492
VDDGPU_MODE: J4.8 | length 0.5
  L1_Top w0.152: v1(87.941,75.899) J4.8@87.941,76.349
VDDGPU_PWM: J4.7 U1.C15 | length 38.5
  L1_Top w0.152: J4.7@87.441,76.349 v1(87.441,76.799)
  L5_Sig2 w0.152: v8(66.241,47.549) 66.343,47.65 66.343,48.655 v2(66.837,49.149)
  L6_Sig3 w0.152: v2(66.837,49.149) 70.388,52.7 70.388,53.699 70.451,53.763 70.451,53.905 70.388,53.969 v6(70.388,56.101)
  L8_Sig4 w0.152: v6(70.388,56.101) 70.388,59.746 v1(87.441,76.799)
VDDIO_1V8: J2.25 J4.9 L2.2 | length 74.8
  L1_Top w0.152: J4.9@88.441,76.349 v1(88.441,76.799)
  L1_Top w0.254: v1(45.941,76.799) 49.442,80.3 v4(87.461,80.3) ; v1(91.567,57.146) L2.2@91.567,58.349
  L6_Sig3 w0.254: v1(45.941,76.799) 45.947,76.794 v9(45.947,76.351)
  L8_Sig4 w0.254: v1(88.441,76.799) 88.441,73.528 96.582,65.387 97.013,65.387 97.144,65.256 97.144,65.072 96.951,64.878 96.951,62.53 v1(91.567,57.146)
  L8_Bottom w0.254: v4(87.461,80.3) 88.441,79.32 v1(88.441,76.799)
  other v2: 87.461,80.3
  other v3: 87.461,80.3